# Altium PCB cnc_60X70_PCB.PcbDoc (part 2 of 2)
Units mil, origin at the board's own origin, x right, y up, seen from the top; angles counter-clockwise.
Board outline 3602.36 x 2362.2 mil, 2 copper layers (Top Layer, Bottom Layer); 111 components, 89 nets, 384 pads, 132 vias.
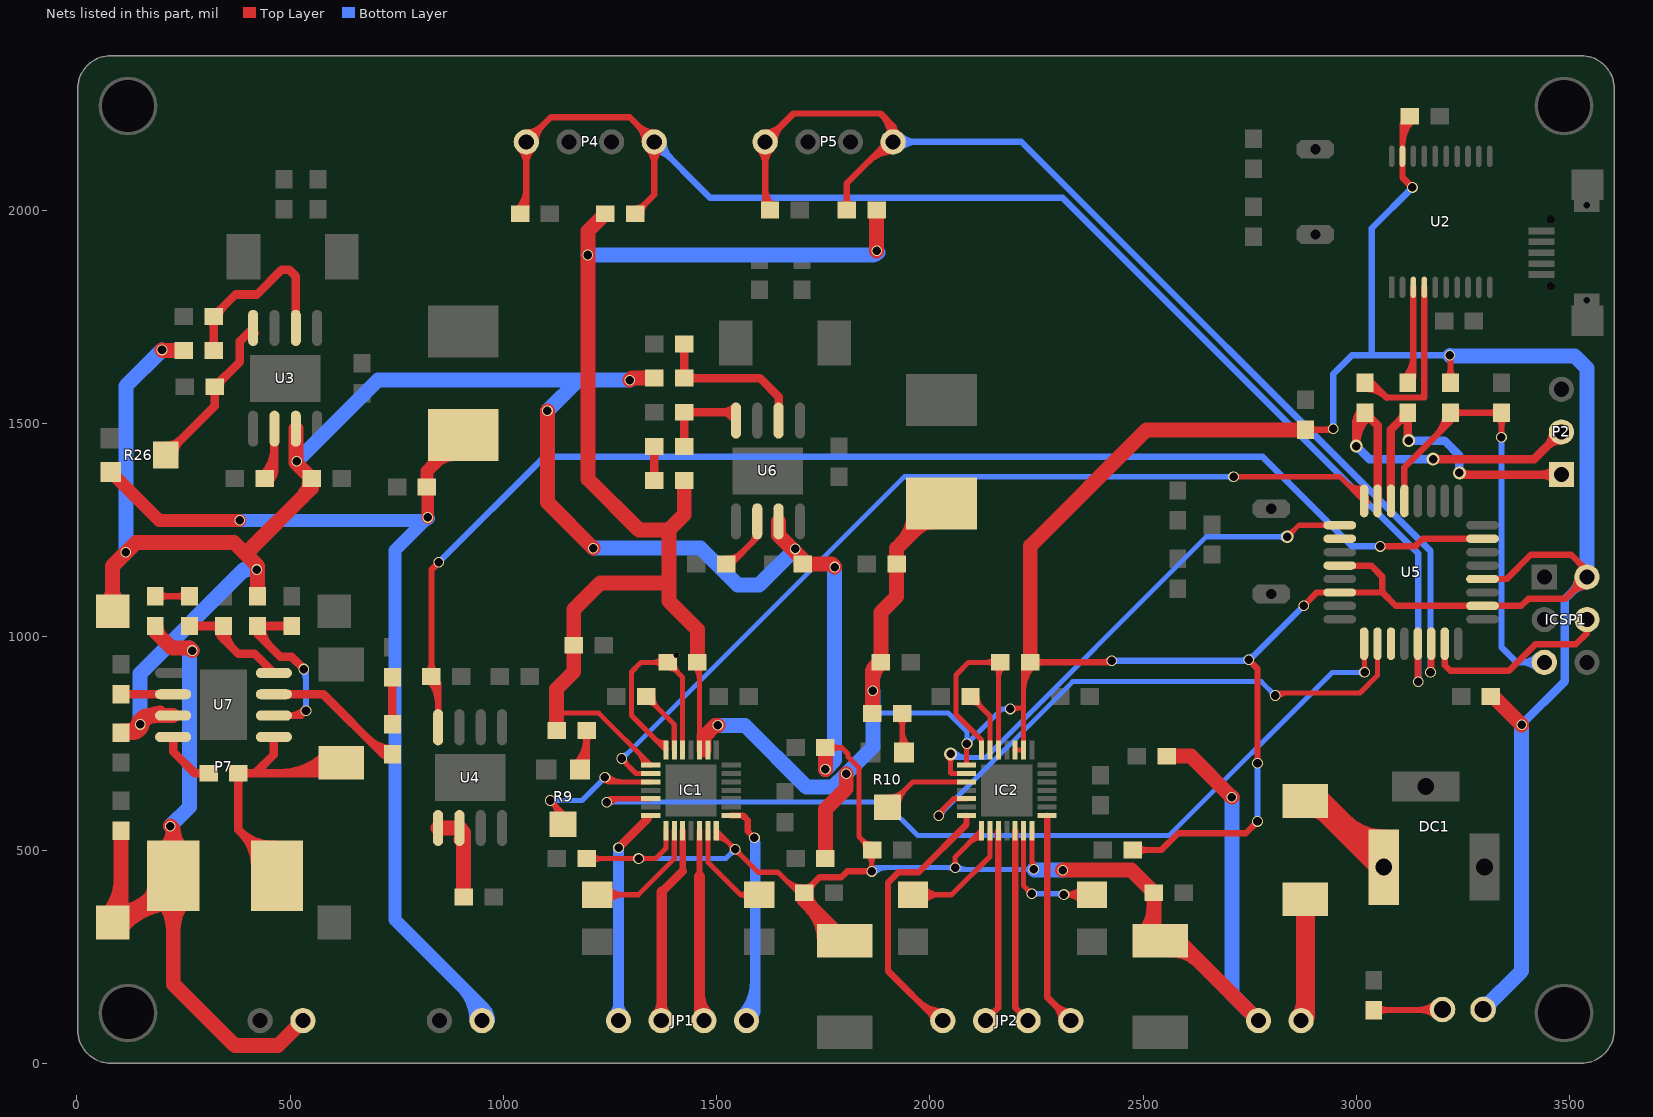
[diagram p2: the nets of this part, all layers, seen from the top]

## Via types
v1: diameter 25, hole 20, Top Layer to Bottom Layer, 93 vias
v2: diameter 28, hole 14, Top Layer to Bottom Layer, 28 vias
v3: diameter 30, hole 20, Top Layer to Bottom Layer, 10 vias
v4: diameter 14, hole 14, Top Layer to Bottom Layer, 1 vias

## Nets (pads, with @x,y where several pads share a name; then routed paths per layer and width w, separated by ;. In a path a pad name is that pad's centre, name@x,y a point inside that pad or via, vN(x,y) a via of type N, cw(c..) or ccw(c..) an arc to the next point about the centre after c; other vN are vias at no path point) (continued)
NetC35_1: C35.1 D5.2 L3.2 U7.1 | length 1249.4
  Top Layer w15: L3.2@469.02,440.16 L3.2@469.02,457.16 ; D5.2@595.15,680.16 D5.2@620,705
  Top Layer w20: C35.1@372.17,673.31 cw(c355.63,656.78) 379.01,656.78 cw(c402.4,656.78) C35.1@385.86,673.31 ; 381.34,544.84 ccw(c459.31,622.81) L3.2@465.95,512.74 ; 385.2,540.98 cw(c306.03,461.81) L3.2@417.99,461.81 ; C35.1@387.83,673.31 cw(c404.36,656.78) 404.36,680.16 cw(c404.36,703.54) C35.1@387.83,687.01 ; L3.2@412.77,513.41 ccw(c462.89,563.52) L3.2@467.15,492.78 ; L3.2@419.34,506.84 cw(c374.31,461.81) L3.2@437.99,461.81 ; U7.1@462.12,765.16 462.12,723.94 418.35,680.16 ; L3.2@469.02,457.16 379.01,547.17 C35.1@379.01,680.16 418.35,680.16 ; 475.33,680.16 ccw(c475.33,835.89) D5.2@585.45,725.77 ; 523.62,680.16 ccw(c523.62,787.6) D5.2@599.59,711.63 ; D5.2@571.9,680.16 ccw(c571.9,739.32) D5.2@613.74,697.48 ; D5.2@595.15,680.16 418.35,680.16
NetC35_2: C35.2 U7.8 | length 175.2
  Top Layer w20: U7.8@225.9,765.16 225.9,730.79 276.54,680.16 C35.2@309.01,680.16 ; C35.2@300.2,673.31 ccw(c283.66,656.78) 283.66,680.16 ccw(c283.66,703.54) C35.2@300.2,687.01
NetC38_1: C38.1 U7.3 | length 459.6
  Top Layer w20: U7.3@462.12,865.16 577.76,865.16 717.91,725 ; 682.4,760.51 ccw(c740,818.11) C38.1@740,736.65 ; 716.54,726.37 ccw(c740,749.83) C38.1@740,716.65 ; C38.1@732.87,718.44 ccw(c717.91,704.66) 717.91,725 ; C38.1@732.87,731.56 cw(c717.91,745.34) 717.91,725 ; C38.1@740,725 717.91,725
NetC38_2: C38.2 R40.2 | length 183.5
  Top Layer w20: C38.2@733.15,803.82 ccw(c716.62,820.35) 740,820.35 ccw(c763.38,820.35) C38.2@746.85,803.82 ; R40.2@733.15,896.18 cw(c716.62,879.65) 740,879.65 cw(c763.38,879.65) R40.2@746.85,896.18 ; C38.2@740,795 R40.2@740,905
NetD1_1: D1.1 DC1.2 | length 405.3
  Top Layer w60: D1.1@2880,615 2908.78,615 DC1.2@3063.78,460 ; D1.1@2893.78,605.63 cw(c2893.78,546.8) 2935.38,588.4 ; 2963.77,560.01 ccw(c3063.78,660.01) DC1.2@3063.78,518.58
NetD1_2: D1.2 P1.1 | length 393.3
  Top Layer w15: P1.1@2870,100 P1.1@2880,110
  Top Layer w45: P1.1@2865.03,104.97 ccw(c2828.89,141.11) 2880,141.11 ; D1.2@2868.07,373.07 cw(c2839.27,344.27) 2880,344.27 cw(c2920.73,344.27) D1.2@2891.93,373.07 ; P1.1@2880,110 D1.2@2880,385
NetD2_2: D2.2 R11.1 | length 291.7
  Top Layer w15: R11.1@3040,125 D2.2@3200.2,125 ; R11.1@3048.62,116.39 cw(c3069.42,95.58) 3069.42,125 cw(c3069.42,154.42) R11.1@3048.62,133.62 ; 3144.15,125 ccw(c3144.15,183.49) D2.2@3185.51,142.13 ; 3150.04,125 cw(c3150.04,74.85) D2.2@3185.51,110.31
NetIC1_1: IC1.1 JP1.1 | length 644.4
  Top Layer w15: IC1.1@1534.48,580.95 1561.77,580.95 1572.83,569.88 1572.83,544.29 v1(1588.58,528.54)
  Bottom Layer w12: JP1.1@1570,100 JP1.1@1572.83,102.83
  Bottom Layer w25: JP1.1@1557.96,112.04 ccw(c1479.28,190.72) 1590.55,190.72 ; JP1.1@1572.83,102.83 1590.55,120.55 v1@1590.55,517.72 ; JP1.1@1575.64,94.36 ccw(c1539.63,130.37) 1590.55,130.37
NetIC1_12: IC1.12 IC1.14 R14.1 | length 680.5
  Top Layer w12: 1352.54,762.89 ccw(c1380.94,791.29) IC1.14@1380.94,751.13 ; 1373.02,742.4 ccw(c1380.94,750.32) IC1.14@1380.94,739.13 ; R14.1@1373.35,930.32 ccw(c1349.99,906.96) 1349.99,940 ccw(c1349.99,973.04) R14.1@1373.35,949.68 ; IC1.14@1380.94,734.49 1300.2,815.23 1300.2,917.32 1322.87,940 R14.1@1385,940 ; R14.1@1380.94,935.94 R14.1@1385,940 ; R14.1@1386.97,926.31 cw(c1386.97,898.03) 1406.97,918.03 ; R14.1@1400.65,940 ccw(c1438.44,940) 1411.72,913.28 ; IC1.12@1420.31,734.49 1420.31,904.69 R14.1@1385,940
  other v4: 1405.51,956.69
NetIC1_13: IC1.13 R12.2 | length 204.6
  Top Layer w12: R12.2@1335,860 1400.63,794.37 IC1.13@1400.63,734.49 ; R12.2@1336.97,846.32 cw(c1336.97,818.03) 1356.97,838.03 ; R12.2@1350.65,860 ccw(c1388.44,860) 1361.72,833.28
NetIC1_17: IC1.17 R9.3 | length 562.4
  Top Layer w12: v1@1110.24,609.64 cw(c1110.24,593.95) 1121.33,605.05 cw(c1132.43,616.14) v1@1116.74,616.14 ; v1(1110.24,616.14) 1140,586.38 R9.3@1140,560 ; v1@1111.71,614.66 cw(c1072,574.95) R9.3@1126.79,562.63 ; 1127.13,599.25 cw(c1097.17,569.29) R9.3@1138.5,560 ; v1@1234.3,666.39 ccw(c1250.48,682.56) 1250.48,659.69 ; v1(1238.19,670.28) 1248.78,659.69 IC1.17@1345.51,659.69 ; v1@1242.79,674.87 ccw(c1279.45,711.53) 1279.45,659.69
  Bottom Layer w12: v1(1110.24,616.14) 1184.06,616.14 v1(1238.19,670.28) ; v1@1114.83,611.55 cw(c1125.93,600.45) 1125.93,616.14 cw(c1125.93,631.83) v1@1114.83,620.74 ; v1@1231.69,670.28 cw(c1216,670.28) 1227.09,659.18 cw(c1238.19,648.08) v1@1238.19,663.78
NetIC1_21: IC1.21 JP1.4 | length 567.6
  Top Layer w20: v1(1270,505.44) 1338.98,574.41
  Bottom Layer w25: JP1.4@1257.96,112.04 ccw(c1228.89,141.11) 1270,141.11 ccw(c1311.11,141.11) JP1.4@1282.04,112.04 ; JP1.4@1270,100 v1(1270,505.44)
NetIC1_23: IC1.23 R2.1 | length 429.5
  Top Layer w12: R2.1@1220,395.12 1316.38,395.12 1400.63,479.37 IC1.23@1400.63,545.51 ; R2.1@1233.48,385.57 cw(c1256.52,362.54) 1256.52,395.12 cw(c1256.52,427.7) R2.1@1233.48,404.66 ; R2.1@1241.97,377.09 cw(c1285.49,333.56) 1285.49,395.12 cw(c1285.49,456.67) R2.1@1241.97,413.15
NetIC1_24: IC1.24 JP1.3 | length 530.9
  Top Layer w15: 1420.31,450.82 IC1.24@1420.31,545.51
  Top Layer w20: 1371.06,401.57 1420.31,450.82
  Top Layer w25: JP1.3@1357.96,112.04 ccw(c1326.33,143.67) 1371.06,143.67 ; JP1.3@1370,100 1371.06,101.06 1371.06,401.57 ; 1371.06,138.54 ccw(c1408.54,138.54) JP1.3@1382.04,112.04
NetIC1_26: IC1.26 JP1.2 | length 523
  Top Layer w12: JP1.2@1460.63,109.37 JP1.2@1470,100
  Top Layer w15: 1459.68,437.99 IC1.26@1459.68,545.51
  Top Layer w25: 1459.68,166.02 ccw(c1536.02,166.02) JP1.2@1482.04,112.04 ; 1459.68,437.99 1459.68,110.32 JP1.2@1470,100
NetIC1_27: IC1.27 R1.1 | length 269.7
  Top Layer w12: IC1.27@1479.37,545.51 1479.37,471.42 1555.67,395.12 ; R1.1@1573.05,384.15 ccw(c1555.67,375.87) 1555.67,395.12 ; R1.1@1573.05,406.09 cw(c1555.67,414.37) 1555.67,395.12 ; R1.1@1600,395.12 1555.67,395.12
NetIC2_1: IC2.1 JP2.1 | length 587.5
  Top Layer w15: IC2.1@2274.48,580.95 2274.48,155.52 JP2.1@2330,100 ; JP2.1@2307.97,100 ccw(c2254.79,100) 2292.4,137.6 ccw(c2330,175.21) JP2.1@2330,122.03
NetIC2_12: IC2.12 IC2.14 R15.1 | length 640.9
  Top Layer w12: 2116.31,762.63 cw(c2104.9,751.22) IC2.14@2121.04,751.22 ; IC2.14@2120.94,734.49 2120.94,758 2061.02,817.91 2061.02,910.43 2090.59,940 R15.1@2165,940 2160.31,935.31 IC2.12@2160.31,734.49 ; R15.1@2153.36,949.68 cw(c2129.99,973.04) 2129.99,940 cw(c2129.99,906.96) 2153.36,930.32 cw(c2136.56,913.53) 2160.31,913.53 ; 2160.31,900.39 cw(c2202.64,900.39) R15.1@2172.71,930.32
NetIC2_13: IC2.13 R13.2 | length 196.3
  Top Layer w12: R13.2@2095,860 2140.63,814.37 IC2.13@2140.63,734.49 ; R13.2@2096.97,846.31 cw(c2096.97,818.03) 2116.97,838.03 ; R13.2@2110.65,860 ccw(c2148.44,860) 2121.72,833.28
NetIC2_17: IC2.17 R10.3 | length 326.8
  Top Layer w12: R10.3@1900,600 1959.68,659.69 IC2.17@2085.51,659.69 ; R10.3@1901.49,624 ccw(c1901.49,678.33) 1939.91,639.91 ; R10.3@1913.49,600 cw(c1946.08,600) R10.3@1923.04,623.04 ; R10.3@1925.49,600 cw(c1987.05,600) 1943.52,643.53
NetIC2_21: IC2.21 JP2.4 | length 764.4
  Top Layer w12: JP2.4@2018.11,100 JP2.4@2030,100
  Top Layer w15: 1972.1,146.01 ccw(c2030,203.91) JP2.4@2030,122.03 ; 1997.71,120.4 ccw(c2030,152.7) JP2.4@2030,107.03 ; 2000.8,117.31 cw(c1983.5,100) JP2.4@2007.97,100 ; JP2.4@2018.11,100 1901.57,216.54 1901.57,423.23 1926.18,447.83 1973.43,447.83 2085.51,559.92 IC2.21@2085.51,580.95
NetIC2_23: IC2.23 R4.1 | length 426.2
  Top Layer w12: R4.1@1960,395.12 2050.63,395.12 2140.63,485.12 IC2.23@2140.63,545.51 ; R4.1@1973.48,385.58 cw(c1996.52,362.54) 1996.52,395.12 cw(c1996.52,427.7) R4.1@1973.48,404.66 ; R4.1@1981.96,377.09 cw(c2025.49,333.57) 2025.49,395.12 cw(c2025.49,456.67) R4.1@1981.96,413.15
NetIC2_24: IC2.24 JP2.3 | length 458.1
  Top Layer w15: JP2.3@2130,100 2160.31,130.31 IC2.24@2160.31,545.51
NetIC2_26: IC2.26 JP2.2 | length 458.1
  Top Layer w15: IC2.26@2199.68,545.51 2199.68,130.32 JP2.2@2230,100
NetIC2_27: IC2.27 R3.1 | length 516.3
  Top Layer w12: IC2.27@2219.37,545.51 2219.37,416.46 v1(2238.19,397.64) ; v1@2231.69,397.64 ccw(c2216,397.64) 2227.09,408.73 ccw(c2238.19,419.83) v1@2238.19,404.14 ; v1@2315.84,395.67 ccw(c2315.84,455.34) R3.1@2358.03,413.15 ; v1@2318.57,391.07 cw(c2329.67,379.98) 2329.67,395.67 cw(c2329.67,411.36) v1@2318.57,400.27 ; 2342.58,395.67 cw(c2342.58,362.24) R3.1@2366.43,385.66 ; R3.1@2357.87,377.26 ccw(c2313.98,334.15) v1(2313.98,395.67) 2379.45,395.67 R3.1@2380,395.12
  Bottom Layer w12: v1(2238.19,397.64) 2315.94,397.64 v1(2313.98,395.67) ; v1@2242.79,393.04 cw(c2253.88,381.95) 2253.88,397.64 cw(c2253.88,413.33) v1@2242.79,402.23 ; 2293.53,397.64 cw(c2293.53,375.22) v1@2309.38,391.07
NetR5_1: R5.1 R9.1 | length 260.3
  Top Layer w15: R9.1@1167.97,700.34 ccw(c1102.71,765.6) R5.1@1195,765.6 ; R9.1@1178.58,689.73 ccw(c1138.92,729.39) 1195,729.39 ; R9.1@1179.37,688.94 1195,704.57 R5.1@1195,780 ; R5.1@1186.38,771.39 cw(c1165.58,750.58) 1195,750.58 cw(c1224.42,750.58) R5.1@1203.62,771.39
NetR6_1: R6.1 R10.1 | length 234
  Top Layer w12: R6.1@1925.32,810.32 cw(c1901.96,786.96) 1935,786.96 cw(c1968.04,786.96) R6.1@1944.68,810.32 ; R10.1@1926.91,741.4 ccw(c1907.37,760.94) 1935,760.94 ; 1935,753.06 ccw(c1963.49,753.06) R10.1@1943.34,732.91 ; 1935,782.03 ccw(c1992.46,782.03) R10.1@1951.83,741.4 ; R6.1@1935,820 1935,733.31 R10.1@1939.37,728.94
NetR16_2: R16.2 R17.2 U3.2 | length 555.5
  Top Layer w20: R17.2@313.98,1677.48 ccw(c297.44,1694.01) 320.83,1694.01 ccw(c344.21,1694.01) R17.2@327.67,1677.48 ; R16.2@313.98,1743.78 cw(c297.44,1727.25) 320.83,1727.25 cw(c344.21,1727.25) R16.2@327.67,1743.78 ; R17.2@320.83,1670.63 R16.2@320.83,1750.63 372.36,1802.17 422.24,1802.17 480.31,1860.24 498.03,1860.24 513.46,1844.8 U3.2@513.46,1723.9 ; R16.2@322.8,1760.31 ccw(c322.8,1778.94) R16.2@335.97,1765.77 ; R16.2@332.48,1750.63 cw(c360.61,1750.63) 340.72,1770.52
NetR18_2: R18.2 U3.6 | length 272.8
  Top Layer w20: R18.2@435.95,1377.48 ccw(c369.51,1443.91) 463.46,1443.91 ; R18.2@440.83,1370.63 463.46,1393.27 U3.6@463.46,1487.68 ; R18.2@442.8,1380.31 ccw(c442.8,1398.94) R18.2@455.97,1385.77 ; R18.2@450.09,1363.34 ccw(c417.8,1395.63) 463.46,1395.63 ; R18.2@452.48,1370.63 cw(c480.61,1370.63) 460.72,1390.52
NetR19_2: R19.2 U2.4 | length 496.8
  Top Layer w15: R19.2@3020,1580.85 cw(c3020,1508.28) 3071.31,1559.59 ; R19.2@3020,1595 3035.9,1595 3070.19,1560.72 3158.77,1560.72 U2.4@3158.77,1819 ; R19.2@3020,1595.85 cw(c3020,1559.49) 3045.71,1585.2
NetR21_2: R21.2 R26.3 U3.4 | length 557.5
  Top Layer w20: R26.3@208.46,1425.79 323.47,1540.79 R21.2@323.47,1585.79 381.89,1644.21 381.89,1692.32 U3.4@413.46,1723.9 ; R26.3@208.46,1447.28 ccw(c208.46,1499.18) 245.16,1462.48 ; R26.3@228.46,1427.28 cw(c273.14,1427.28) 241.55,1458.87 ; R21.2@316.62,1578.94 cw(c300.08,1562.41) 323.47,1562.41 cw(c346.85,1562.41) R21.2@330.31,1578.94 ; R21.2@325.44,1595.47 ccw(c325.44,1614.1) R21.2@338.61,1600.93 ; R21.2@335.12,1585.79 cw(c363.25,1585.79) 343.36,1605.68 ; 393.64,1704.07 cw(c412.06,1685.64) U3.4@416.71,1711.28
NetR22_2: R22.2 U4.5 U4.6 | length 232.1
  Top Layer w35: U4.5@847.01,551.57 U4.6@897.01,551.57 907.01,541.57 R22.2@907.01,389.69 ; U4.6@901.03,525.08 cw(c886.6,510.65) 907.01,510.65
NetR25_1: R25.1 U2.3 | length 317.9
  Top Layer w15: R25.1@3111.38,1605.58 ccw(c3058.76,1658.2) 3133.18,1658.2 ; R25.1@3120,1595 3133.18,1608.18 U2.3@3133.18,1819 ; R25.1@3121.99,1594.98 ccw(c3094.98,1621.99) 3133.18,1621.99
NetR29_2: R29.2 R31.2 U6.2 | length 485.2
  Top Layer w20: R31.2@1417.21,1613.03 ccw(c1400.67,1629.56) 1424.06,1629.56 ccw(c1447.44,1629.56) R31.2@1430.9,1613.03 ; R29.2@1417.21,1679.33 cw(c1400.67,1662.8) 1424.06,1662.8 cw(c1447.44,1662.8) R29.2@1430.9,1679.33 ; R29.2@1424.06,1686.18 R31.2@1424.06,1606.18 1601.5,1606.18 1645.16,1562.52 U6.2@1645.16,1506.65 ; R31.2@1432.87,1599.33 cw(c1449.41,1582.8) 1449.41,1606.18 cw(c1449.41,1629.56) R31.2@1432.87,1613.03
NetR32_2: R32.2 U6.6 | length 197.1
  Top Layer w15: R32.2@1522.01,1170.24 1532.44,1170.24 1595.16,1232.95 U6.6@1595.16,1270.43 ; R32.2@1523.98,1182.42 ccw(c1523.98,1232.27) 1559.23,1197.02 ; 1582.87,1220.67 ccw(c1563.62,1239.92) U6.6@1590.85,1239.92
NetR33_2: R33.2 R35.2 U6.4 | length 374.9
  Top Layer w20: R35.2@1417.21,1453.03 ccw(c1400.67,1469.56) 1424.06,1469.56 ccw(c1447.44,1469.56) R35.2@1430.9,1453.03 ; R33.2@1417.21,1519.33 cw(c1400.67,1502.8) 1424.06,1502.8 cw(c1447.44,1502.8) R33.2@1430.9,1519.33 ; R35.2@1424.06,1446.18 R33.2@1424.06,1526.18 1525.63,1526.18 ; R33.2@1432.87,1519.33 cw(c1449.41,1502.8) 1449.41,1526.18 cw(c1449.41,1549.56) R33.2@1432.87,1533.03 ; 1514.27,1526.18 ccw(c1514.27,1568.05) U6.4@1543.88,1538.45 ; U6.4@1543.5,1537.89 cw(c1525.63,1545.67) 1525.63,1526.18 ; U6.4@1545.16,1506.65 1525.63,1526.18
NetR35_1: R35.1 R37.2 | length 153.5
  Top Layer w20: R37.2@1347.21,1373.03 ccw(c1330.67,1389.56) 1354.06,1389.56 ccw(c1377.44,1389.56) R37.2@1360.9,1373.03 ; R35.1@1347.21,1439.33 cw(c1330.67,1422.8) 1354.06,1422.8 cw(c1377.44,1422.8) R35.1@1360.9,1439.33 ; R37.2@1354.06,1366.18 R35.1@1354.06,1446.18
NetR38_2: R38.2 R39.2 U7.2 | length 608.5
  Top Layer w15: R39.2@424.01,1006.1 R39.2@424.01,1025.16 ; U7.2@462.12,815.16 525.79,815.16 v1(537.4,826.77) ; U7.2@497.29,815.16 ccw(c497.29,866.88) v1@533.87,830.31
  Top Layer w20: R39.2@424.01,1006.1 477.36,952.76 503.94,952.76 v1(532.48,924.21) ; R39.2@424.01,1025.16 R38.2@504.01,1025.16 ; R39.2@430.86,1018.31 cw(c447.4,1001.78) 447.4,1025.16 cw(c447.4,1048.54) R39.2@430.86,1032.01 ; R39.2@433.7,1023.19 ccw(c498.33,1023.19) 452.63,977.49 ; R38.2@497.17,1018.31 ccw(c480.63,1001.78) 480.63,1025.16 ccw(c480.63,1048.54) R38.2@497.17,1032.01
  Bottom Layer w15: v1@528.94,920.68 cw(c508.53,900.26) 537.4,900.26 ; v1(532.48,924.21) 537.4,919.29 v1(537.4,826.77)
NetR41_1: R41.1 R42.2 | length 172.4
  Top Layer w15: R42.2@184.02,1095.16 R41.1@264.01,1095.16 ; R42.2@192.63,1086.54 cw(c213.44,1065.74) 213.44,1095.16 cw(c213.43,1124.57) R42.2@192.63,1103.77 ; R41.1@255.4,1086.54 ccw(c234.6,1065.74) 234.6,1095.16 ccw(c234.6,1124.58) R41.1@255.4,1103.78
NetR41_2: R41.2 R43.2 U7.4 | length 513.4
  Top Layer w20: R41.2@264.01,1025.16 R43.2@344.01,1025.16 344.01,994.57 378.94,959.65 417.64,959.65 U7.4@462.12,915.16 ; R41.2@270.86,1018.31 cw(c287.4,1001.78) 287.4,1025.16 cw(c287.4,1048.54) R41.2@270.86,1032.01 ; R43.2@334.17,1026.28 ccw(c361.64,1017.66) 341.28,997.3 ; R43.2@337.17,1018.31 ccw(c320.63,1001.78) 320.63,1025.16 ccw(c320.63,1048.54) R43.2@337.17,1032.01 ; R43.2@353.26,1020.29 ccw(c397.17,1006.51) 364.62,973.96 ; 441.09,936.19 cw(c420.05,915.16) U7.4@449.8,915.16 ; 344.01,999.81 ccw(c320.63,999.81) 337.17,1016.34 cw(c320.63,999.81) 344.01,999.81 ; 344.01,999.81 cw(c367.4,999.81) 350.86,1016.34 ccw(c367.4,999.81) 344.01,999.81
NetR44_2: R44.2 U7.6 | length 158.6
  Top Layer w20: R44.2@104.01,865.16 U7.6@225.9,865.16 ; R44.2@110.86,858.31 cw(c127.39,841.78) 127.39,865.16 ; R44.2@110.86,872.01 ccw(c127.4,888.55) 127.4,865.16
RESET_MCU: C18.2 ICSP1.5 R36.1 U5.29 | length 1342.9
  Top Layer w15: U5.29@3112.09,1318.35 3112.09,1397.52 3220,1505.43 R36.1@3220,1525 C18.2@3340,1525 3339.57,1524.57 v1(3339.57,1467.52) ; 3186.75,1472.18 ccw(c3135.9,1523.03) R36.1@3207.81,1523.03 ; 3212.36,1497.79 ccw(c3187.12,1523.03) R36.1@3222.81,1523.03 ; R36.1@3228.61,1516.39 cw(c3249.42,1495.58) 3249.42,1525 cw(c3249.42,1554.42) R36.1@3228.61,1533.62 ; C18.2@3331.38,1514.42 cw(c3311.63,1494.66) 3339.57,1494.66 ; C18.2@3331.38,1516.39 ccw(c3310.58,1495.58) 3310.58,1525 ccw(c3310.58,1554.42) C18.2@3331.38,1533.62 ; 3339.57,1492.57 cw(c3370.46,1492.57) C18.2@3348.62,1514.42
  Bottom Layer w15: v1(3339.57,1467.52) 3339.57,975.39 3374.96,940 ICSP1.5@3440,940 ; ICSP1.5@3424.42,924.43 ccw(c3386.82,886.82) 3386.82,940 ccw(c3386.82,993.18) ICSP1.5@3424.42,955.58
RXD: P2.1 R25.2 U5.30 | length 886.1
  Top Layer w20: U5.30@3080.59,1318.35 3080.59,1485.59 R25.2@3120,1525 3120,1461.69 v3(3122.05,1459.65) ; 3100.11,1505.11 cw(c3120,1485.21) R25.2@3120,1513.35 ; R25.2@3104.86,1509.86 ccw(c3091.69,1523.03) R25.2@3110.32,1523.03 ; R25.2@3113.15,1516.18 cw(c3096.62,1499.65) 3120,1499.65 cw(c3143.38,1499.65) R25.2@3126.85,1516.18 ; 3120,1476.66 ccw(c3139.06,1476.66) v3@3125.58,1463.18 ; v3(3241.14,1383.86) 3245,1380 P2.1@3480,1380 ; v3@3244.68,1387.39 ccw(c3262.52,1405.24) 3262.52,1380 ; P2.1@3466.19,1366.19 ccw(c3432.86,1332.86) 3432.86,1380 ccw(c3432.86,1427.14) P2.1@3466.19,1393.81
  Bottom Layer w20: v3(3122.05,1459.65) 3205.71,1459.65 3241.14,1424.21 v3(3241.14,1383.86)
TXD: P2.2 R19.1 U5.31 | length 1084.4
  Top Layer w20: v3(2999.02,1446.85) 2999.02,1504.02 R19.1@3020,1525 3049.09,1495.91 U5.31@3049.09,1318.35 ; v3@2999.02,1448.99 cw(c3094.04,1448.99) R19.1@3026.85,1516.18 ; 2999.02,1497.28 cw(c3045.75,1497.28) R19.1@3012.7,1530.33 ; 3000.1,1505.11 cw(c3020,1485.21) 3020,1513.35 cw(c3020,1485.21) 3039.89,1505.11 ; R19.1@3004.86,1509.86 ccw(c2991.68,1523.03) R19.1@3010.31,1523.03 ; R19.1@3029.68,1523.03 ccw(c3048.31,1523.03) R19.1@3035.14,1509.86 ; v3(3179.13,1416.34) 3416.34,1416.34 P2.2@3480,1480 ; P2.2@3460.47,1480 cw(c3413.33,1480) 3446.67,1446.67 cw(c3480,1413.33) P2.2@3480,1460.47
  Bottom Layer w20: v3(2999.02,1446.85) 3029.53,1416.34 v3(3179.13,1416.34)
V_PRO: C37.1 L3.1 P6.1 P7.2 R42.1 | length 2410.3
  Top Layer w35: P7.2@68.55,345.62 ccw(c-17.06,431.24) 104.01,431.24 ; P7.2@84.02,352.03 ccw(c84.02,482.57) L3.1@176.33,390.26 ; C37.1@104.01,545.16 104.01,350.16 P7.2@84.02,330.16 116.22,330.16 L3.1@226.22,440.16 ; P7.2@114.96,328.89 cw(c226.22,217.63) L3.1@226.22,374.98 ; L3.1@167.23,381.17 ccw(c129.9,418.5) L3.1@182.7,418.5 ; R42.1@184.02,1025.16 184.02,1011.85 220.71,975.16 222.47,975.16 224.21,973.43 264.76,973.43 v1(270.67,967.52) ; R42.1@186.2,1023.19 ccw(c218.85,1023.19) 195.76,1000.1 ; L3.1@195.44,387.73 cw(c121.15,313.43) 226.22,313.43 cw(c331.3,313.43) L3.1@257,387.73 ; L3.1@199.95,496.51 ccw(c159.92,549.37) v1@226.22,549.37 ; v1(219.49,556.1) v1@226.22,549.37 ; L3.1@252.5,496.51 cw(c292.52,549.37) v1@226.22,549.37 ; P6.1@530,100 471.34,41.34 371.06,41.34 226.22,186.18 L3.1@226.22,440.16 ; L3.1@226.22,440.16 v1@226.22,549.37
  Bottom Layer w35: v1(219.49,556.1) 264.76,601.38 264.76,973.43 v1(270.67,967.52)
VCC: C8.1 C10.1 C16.2 C27.2 C30.2 C34.1 D2.1 IC1.9 IC1.10 IC1.15 IC2.9 IC2.10 IC2.15 ICSP1.2 L2.1 R5.2 R6.2 R7.2 R8.2 R14.2 R15.2 R27.2 R28.2 R36.2 R37.1 U2.19 U5.4 U5.6 U5.18 U5.20 | length 13302.6
  Top Layer w12: 1130.91,820.87 1223.7,820.87 IC1.15@1345.51,699.06 ; 1317.11,727.46 cw(c1288.71,699.06) IC1.15@1328.87,699.06 ; 1337.59,706.97 cw(c1329.68,699.06) IC1.15@1340.87,699.06 ; R14.2@1447.29,930.32 cw(c1417.38,900.41) 1459.68,900.41 ; R14.2@1455,940 1459.68,935.32 IC1.10@1459.68,734.49 1470.47,734.49 IC1.9@1479.37,734.49 ; 1459.68,913.51 cw(c1483.45,913.51) R14.2@1466.64,930.32 ; v1@2082.02,744.42 cw(c2073.59,735.99) 2085.51,735.99 ; IC2.15@2085.51,699.06 2085.51,747.91 v1(2086.61,749.02) ; 2085.51,730.66 cw(c2104.97,730.66) v1@2091.21,744.42 ; v1(2187.99,830.71) 2189.96,832.68 2219.37,832.68 ; v1@2192.59,826.11 cw(c2208.44,810.26) 2208.44,832.68 ; IC2.10@2199.68,734.49 IC2.9@2219.37,734.49 2219.37,832.68 ; 2219.37,873.98 cw(c2299.05,873.98) R15.2@2242.71,930.32 ; 2219.37,902.95 cw(c2270.08,902.95) R15.2@2234.22,938.81 ; R15.2@2235,940 2219.37,924.37 2219.37,832.68
  Top Layer w15: R15.2@2235,940 2422.28,940 v1(2426.18,943.9) ; R15.2@2245.59,931.38 cw(c2266.39,910.58) 2266.39,940 cw(c2266.39,969.42) R15.2@2245.59,948.62 ; 2404.7,940 ccw(c2404.7,965.38) v1@2422.65,947.43 ; R8.2@2475,500 2542.32,500 2581.69,539.37 2740.16,539.37 v1(2767.72,566.93) ; R8.2@2485.59,491.39 cw(c2506.39,470.58) 2506.39,500 cw(c2506.39,529.42) R8.2@2485.59,508.62 ; v1(2747.05,945.87) 2767.72,925.2 v1(2767.72,703.74) ; v1(2875.98,1072.83) 2906.93,1103.78 U5.6@2960.51,1103.78 3060.59,1103.78 ; C27.2@2880,1485 2942.68,1485 v1(2944.88,1487.2) ; C27.2@2888.61,1476.39 cw(c2909.42,1455.58) 2909.42,1485 cw(c2909.42,1514.42) C27.2@2888.61,1493.62 ; 2927.49,1485 ccw(c2927.49,1504.6) v1@2941.35,1490.74 ; U5.4@2960.51,1166.77 3034.02,1166.77 3060.59,1140.2 3060.59,1103.78 ; 3107.59,2153.31 cw(c3189.73,2153.31) C16.2@3131.65,2211.39 ; 3107.59,2189.52 cw(c3153.52,2189.52) C16.2@3121.04,2221.99 ; C16.2@3125,2220 3107.59,2202.59 U2.19@3107.59,2126.09 3107.59,2076.46 v1(3130.91,2053.15) ; R36.2@3211.38,1605.59 ccw(c3190.58,1626.39) 3220,1626.39 ccw(c3249.42,1626.39) R36.2@3228.61,1605.59 ; v1@3214.97,1655.91 cw(c3202.82,1643.77) 3220,1643.77 ; v1(3218.5,1659.45) 3220,1657.95 R36.2@3220,1595 ; U5.20@3295.16,1135.28 3351.81,1135.28 3408.46,1191.93 3502.95,1191.93 3540,1154.88 ICSP1.2@3540,1140 3488.58,1088.58 3402.56,1088.58 3386.26,1072.28 U5.18@3295.16,1072.28 3092.09,1072.28 3060.59,1103.78 ; ICSP1.2@3517.97,1140 cw(c3464.79,1140) 3502.4,1102.4 cw(c3540,1064.79) ICSP1.2@3540,1117.97 ; 3519.44,1175.44 cw(c3486.63,1142.62) ICSP1.2@3532.98,1140.35 ; 3527.8,1167.08 ccw(c3540,1179.28) ICSP1.2@3540,1162.03
  Top Layer w35: R5.2@1125,780 1125,877.95 1165,917.95 C8.1@1165,980 1165,1063.62 1227.36,1125.98 1387.8,1125.98 ; v1(1197.93,1894.78) v1@1198.82,1894.78 ; R27.2@1239.13,1991.69 1198.82,1951.38 v1@1198.82,1894.78 ; R37.1@1424.06,1366.18 1424.06,1286.26 1387.8,1250 ; R14.2@1455,940 1455,1016.46 1387.8,1083.66 1387.8,1125.98 ; 1470.47,734.49 1470.55,734.57 1470.55,766.35 1496.52,792.32 v1(1502.95,792.32) ; R7.2@1755,480 1755,595.55 1803.67,644.22 v1(1803.67,678.67) ; R6.2@1865,820 1865,920 C10.1@1885,940 1885,1057.24 1922.01,1094.25 C34.1@1922.01,1170.24 1922.01,1207.44 L2.1@2027.01,1312.44 ; 1865,891.19 cw(c1931.84,891.19) C10.1@1884.58,938.46 ; 1865,913.07 cw(c1890.86,913.07) C10.1@1883.64,937.9 ; v1(1875,1904.53) R28.2@1875,2000 ; 1932.84,1218.27 ccw(c1859.34,1291.77) L2.1@1962.26,1306.34 ; L2.1@1968.02,1253.45 cw(c2005.35,1216.12) L2.1@2005.35,1268.92 ; R15.2@2235,940 2235,1212.36 2507.64,1485 C27.2@2880,1485 ; C30.2@3315,860 3320.12,860 v1(3386.81,793.31) ; v1@1198.82,1894.78 1198.82,1369.09 1317.91,1250 1387.8,1250 ; 1387.8,1125.98 1387.8,1250
  Bottom Layer w12: 1866.14,820.87 2043.31,820.87 2086.61,777.56 v1(2086.61,749.02) 2168.31,830.71 v1(2187.99,830.71) ; v1@2082.02,753.61 ccw(c2070.92,764.71) 2086.61,764.71 ccw(c2102.31,764.71) v1@2091.21,753.61 ; v1@2086.61,755.52 ccw(c2086.61,771.21) 2097.71,760.11 ccw(c2108.81,749.02) v1@2093.11,749.02 ; v1@2183.4,826.11 ccw(c2172.3,815.02) 2172.3,830.71 ccw(c2172.3,846.4) v1@2183.4,835.3
  Bottom Layer w15: v1(2426.18,943.9) 2747.05,943.9 v1(2875.98,1072.83) ; 2730.22,943.9 ccw(c2730.22,962.69) v1@2743.51,949.4 ; v1@2747.05,950.87 ccw(c2747.05,967.69) 2758.94,955.79 ; v1(2767.72,566.93) v1(2767.72,703.74) ; v1(2944.88,1487.2) 2944.88,1615.16 2989.17,1659.45 3035.43,1659.45 ; v1(3130.91,2053.15) 3035.43,1957.68 3035.43,1659.45 ; v1(3218.5,1659.45) 3035.43,1659.45
  Bottom Layer w20: v1(3386.81,793.31) 3386.81,794.29 3488.19,895.67 3488.19,1088.19 ICSP1.2@3540,1140 ; ICSP1.2@3520.47,1140 cw(c3473.33,1140) 3506.67,1106.67 cw(c3540,1073.33) ICSP1.2@3540,1120.47
  Bottom Layer w35: v1(1197.93,1894.78) 1865.25,1894.78 v1(1875,1904.53) ; v1(1502.95,792.32) 1565.94,792.32 1710.63,647.64 1772.64,647.64 v1(1803.67,678.67) 1866.14,741.14 1866.14,820.87 v1(1866.14,873.03) ; 1863.53,1894.78 ccw(c1863.53,1916) v1@1878.54,1900.99 ; v1(3218.5,1659.45) 3219.49,1658.46 3510.83,1658.46 3540,1629.29 ICSP1.2@3540,1140 ; D2.1@3296.42,126.22 3386.81,216.62 v1(3386.81,793.31) ; D2.1@3296.42,138.72 ccw(c3296.42,168.9) 3317.76,147.56 ccw(c3339.09,126.22) D2.1@3308.92,126.22
VCC_LASER: C25.1 L1.1 P3.1 R26.2 | length 2550.9
  Top Layer w30: R26.2@79.53,1386.42 193.31,1272.64 v1(381.89,1272.64) ; v1(822.83,1279.53) 822.83,1348.62 C25.1@820.83,1350.63 820.83,1387.84 L1.1@905.83,1472.84 ; 831.66,1398.66 ccw(c796.26,1434.06) L1.1@842.06,1454.26 ; 842.57,1409.58 cw(c884.17,1367.98) L1.1@884.17,1426.81
  Bottom Layer w30: v1(381.89,1272.64) v1@815.94,1272.64 ; 812.24,1272.64 ccw(c812.24,1290.13) v1@824.6,1277.76 ; v1(822.83,1279.53) v1@815.94,1272.64 ; 902.09,180.58 cw(c821.51,100) P3.1@935.47,100 ; P3.1@950,100 950,132.68 746.06,336.61 746.06,1202.76 v1@815.94,1272.64 ; 953.31,129.37 cw(c923.94,100) P3.1@965.47,100
VIN: C1.1 C2.1 C3.2 C4.1 C5.2 C6.1 C11.1 C12.1 C20.1 C32.1 C36.1 IC1.22 IC1.28 IC2.22 IC2.28 P1.2 P7.1 R17.1 R31.1 R39.1 U3.7 U6.7 U7.7 | length 10149.5
  Top Layer w12: v1(1316.93,480) C3.2@1195,480 1356.97,480 1380.94,503.97 IC1.22@1380.94,545.51 ; v1@1321.53,475.41 cw(c1332.62,464.31) 1332.62,480 cw(c1332.62,495.69) v1@1321.53,484.6 ; IC1.28@1499.05,528.87 cw(c1499.05,488.71) 1527.45,517.11 ; IC1.28@1499.05,540.87 cw(c1499.05,529.68) 1506.97,537.59 ; IC1.28@1499.05,545.51 1596.73,447.83 1643.7,447.83 1691.54,400 C4.1@1705,400 ; 1530.99,513.57 ccw(c1543.31,525.88) v1@1543.31,508.47 ; 1532.72,511.85 cw(c1522.84,501.97) v1@1536.81,501.97 ; v1@1543.31,495.47 cw(c1543.31,481.5) 1553.19,491.38 ; v1@1549.81,501.97 ccw(c1567.22,501.97) 1554.91,489.65 ; 1660.05,431.49 ccw(c1703.03,474.48) C4.1@1703.03,413.68 ; 1680.53,411 ccw(c1703.03,433.51) C4.1@1703.03,401.68 ; C11.1@1755,740 1793.47,740 1808.07,725.39 1808.07,718.69 1833.66,693.1 1833.66,531.34 C5.2@1865,500 1863.19,498.19 v1(1863.19,449.8) ; C11.1@1766.65,730.32 cw(c1790.01,706.96) 1790.01,740 cw(c1790.01,773.04) C11.1@1766.65,749.68 ; 1838.28,526.72 cw(c1811.55,500) C5.2@1849.35,500 ; 1843.03,521.97 ccw(c1863.03,541.97) C5.2@1863.03,513.68 ; C5.2@1853.35,490.32 cw(c1829.61,466.58) 1863.19,466.58 ; v1@1858.59,454.4 ccw(c1847.5,465.5) 1863.19,465.5 ccw(c1878.88,465.5) v1@1867.79,454.4 ; 1863.19,467.34 cw(c1895.68,467.34) C5.2@1872.71,490.32 ; v1@2054.46,463.26 ccw(c2043.36,474.35) 2059.06,474.35 ccw(c2074.75,474.35) v1@2063.65,463.26 ; v1(2059.06,458.66) 2059.06,483.63 IC2.22@2120.94,545.51 ; 2092.54,517.11 cw(c2120.94,488.71) IC2.22@2120.94,528.87 ; 2113.02,537.59 cw(c2120.94,529.68) IC2.22@2120.94,540.87 ; 2239.05,480.5 ccw(c2268.98,480.5) v1@2247.82,459.34 ; IC2.28@2239.05,545.51 2239.05,456.82 2241.12,454.75 v1(2243.22,454.75) ; 1230.01,480 ccw(c1230.01,446.96) 1206.65,470.32 cw(c1230.01,446.96) 1230.01,480 ; 1230.01,480 cw(c1230.01,513.04) 1206.65,489.68 ccw(c1230.01,513.04) 1230.01,480 ; 1301.24,480 ccw(c1301.24,495.69) 1312.33,484.6 cw(c1301.24,495.69) 1301.24,480 ; 1301.24,480 cw(c1301.24,464.31) 1312.33,475.41 ccw(c1301.24,464.31) 1301.24,480
  Top Layer w15: C4.1@1705,400 1741.02,436.02 1792.32,436.02 1806.1,449.8 v1(1863.19,449.8) ; C4.1@1706.97,412.18 ccw(c1706.97,436.85) C4.1@1724.41,419.41 ; C4.1@1719.15,400 cw(c1753.32,400) 1729.16,424.16
  Top Layer w35: P7.1@68.55,1075.62 ccw(c31.22,1112.96) 84.02,1112.96 ccw(c136.82,1112.96) P7.1@99.48,1075.62 ; P7.1@84.02,1060.16 84.02,1165.71 138.78,1220.47 369.09,1220.47 424.01,1165.55 R39.1@424.01,1095.16 ; C36.1@104.02,775.16 129.49,775.16 ; C36.1@104.3,779.29 ccw(c111.27,831.69) v1(148.65,794.31) ; C36.1@114.47,775.16 ccw(c114.47,828.49) v1@152.18,790.78 ; v1@143.83,795.65 cw(c169.49,788.53) 169.49,815.16 ; v1@145.11,797.85 cw(c186.89,756.07) U7.7@186.89,815.16 ; v1@153.42,792.85 cw(c129.49,800.2) 129.49,775.16 ; v1(199.8,1672.24) 201.42,1670.63 R17.1@250.83,1670.63 ; U7.7@225.9,815.16 169.49,815.16 ; 395.67,1193.9 550.83,1349.05 C20.1@550.83,1370.63 513.46,1407.99 U3.7@513.46,1487.68 ; 528.48,1326.71 ccw(c484.56,1370.63) C20.1@546.67,1370.63 ; v1(1103.35,1529.53) 1103.35,1314.96 v1(1210.63,1207.68) ; v1(1296.26,1601.38) 1301.06,1606.18 R31.1@1354.06,1606.18 ; U6.7@1645.16,1270.43 1645.16,1237.72 1702.01,1180.87 C32.1@1702.01,1170.24 1769.73,1170.24 v1(1776.57,1163.39) ; v1@1687.4,1195.47 cw(c1662.16,1170.24) C32.1@1697.86,1170.24 ; C4.1@1705,400 1705,382.5 C1.1@1800,287.5 ; C4.1@1709.15,400 ccw(c1761.43,400) 1724.47,363.03 ; 1718.98,368.52 cw(c1637.96,287.5) C1.1@1752.54,287.5 ; v1(1754.92,688.98) 1754.92,739.92 C11.1@1755,740 ; v1(2311.02,452.76) 2472.24,452.76 C6.1@2525,400 2525,302.5 C2.1@2540,287.5 2582.5,287.5 P1.2@2770,100 ; C2.1@2498.95,302.96 ccw(c2436.05,365.86) 2525,365.86 ; C12.1@2555,720 2611.69,720 v1(2707.68,624.02) ; C2.1@2565.59,265.63 cw(c2565.59,172.01) 2631.79,238.21 ; 129.49,775.16 v1(148.65,794.31) ; v1(148.65,794.31) 169.49,815.16 ; 160.88,806.55 cw(c195.39,772.04) 195.39,820.85 ccw(c195.39,772.04) 160.88,806.55
  Bottom Layer w12: v1(1316.93,480) 1521.34,480 v1(1543.31,501.97) ; v1@1321.53,475.41 cw(c1332.62,464.31) 1332.62,480 cw(c1332.62,495.69) v1@1321.53,484.6 ; v1@1536.81,501.97 cw(c1521.11,501.97) 1532.21,490.87 cw(c1543.31,479.78) v1@1543.31,495.47 ; v1(1863.19,449.8) 1872.05,458.66 v1(2059.06,458.66) 2062.97,454.75 v1(2243.22,454.75) ; v1@1867.79,445.21 cw(c1900.27,412.72) 1900.27,458.66 ; v1@2054.46,454.07 ccw(c2043.36,442.97) 2043.36,458.66 ccw(c2043.36,474.35) v1@2054.46,463.26 ; v1@2063.65,463.26 ccw(c2084.2,483.81) 2084.2,454.75 ; v1@2238.62,450.15 ccw(c2227.53,439.05) 2227.53,454.75 ccw(c2227.53,470.44) v1@2238.62,459.34
  Bottom Layer w35: v1(115.16,1197.83) 115.16,1587.6 v1(199.8,1672.24) ; v1(148.65,794.31) 148.65,913.88 392.25,1157.48 v1@423.23,1157.48 ; v1(515.75,1411.42) 705.71,1601.38 v1(1296.26,1601.38) 1175.2,1601.38 v1(1103.35,1529.53) ; v1(1210.63,1207.68) 1462.6,1207.68 1549.21,1121.06 1599.41,1121.06 v1@1680.61,1202.26 ; v1(1754.92,688.98) 1776.57,710.63 v1(1776.57,1163.39) ; v1(2243.22,454.75) 2245.21,452.76 v1(2311.02,452.76) ; v1(2707.68,624.02) 2707.68,162.32 P1.2@2770,100 ; 379.58,1144.81 cw(c422.24,1102.14) 422.24,1162.48 ccw(c422.24,1102.14) 379.58,1144.81
  other v1: 422.24,1157.48 1684.06,1205.71
WEAKEN-LASER: R24.1 U4.4 U5.23 | length 3180.9
  Top Layer w15: R24.1@822.84,915.27 ccw(c802.04,936.07) 831.46,936.07 ccw(c860.87,936.07) R24.1@840.07,915.27 ; R24.1@824.81,898.04 cw(c771.22,844.45) 847.01,844.45 ; R24.1@835.42,908.64 cw(c807.43,880.66) 847.01,880.66 ; U4.4@847.01,787.79 847.01,891.1 R24.1@831.46,906.65 831.46,1157.24 v1(848.43,1174.21) ; v1(3055.12,1211.61) 3136.81,1211.61 3154.96,1229.76 U5.23@3295.16,1229.76
  Bottom Layer w15: v1(848.43,1174.21) 1096.46,1422.24 2779.53,1422.24 2990.16,1211.61 v1(3055.12,1211.61)
X-DIR: IC1.19 U5.9 | length 2258.2
  Top Layer w12: v1(1242.13,612.2) 1250.24,620.32 IC1.19@1345.51,620.32 ; v1@1246.72,607.61 cw(c1277.4,576.93) 1277.4,620.32 ; v1@3014.1,920.93 ccw(c3003.01,932.03) 3018.7,932.03 ccw(c3034.39,932.03) v1@3023.3,920.93 ; U5.9@3014.88,952.44 cw(c3005.66,943.22) 3018.7,943.22 ; v1(3018.7,916.34) U5.9@3018.7,982.6
  Bottom Layer w12: v1(1242.13,612.2) 1892.72,612.2 1970.47,534.45 2561.02,534.45 2942.91,916.34 v1(3018.7,916.34) ; v1@1246.72,607.61 cw(c1257.82,596.51) 1257.82,612.2 cw(c1257.82,627.9) v1@1246.72,616.8 ; v1@3014.1,911.74 ccw(c3003.01,900.65) 3003.01,916.34 ccw(c3003.01,932.03) v1@3014.1,920.93
X-LMT: C24.1 P4.1 P4.4 R27.1 U5.13 | length 3830.2
  Top Layer w15: C24.1@1032.49,2000.31 ccw(c981.27,2051.52) 1053.7,2051.52 ; P4.4@1038.12,2144.42 cw(c1000.52,2106.82) 1053.7,2106.82 cw(c1106.88,2106.82) P4.4@1069.28,2144.42 ; C24.1@1043.09,1989.7 ccw(c1017.49,2015.31) 1053.7,2015.31 ; C24.1@1053.7,2006.26 P4.4@1053.7,2160 1111.22,2217.52 1296.18,2217.52 P4.1@1353.7,2160 1353.7,2036.26 R27.1@1309.13,1991.69 ; P4.4@1053.7,2182.03 ccw(c1053.7,2235.21) 1091.3,2197.6 ccw(c1128.91,2160) P4.4@1075.73,2160 ; R27.1@1311.1,2003.88 ccw(c1311.1,2028.54) R27.1@1328.54,2011.1 ; R27.1@1323.29,1991.69 cw(c1357.46,1991.69) 1333.29,2015.85 ; P4.1@1331.67,2160 ccw(c1278.49,2160) 1316.1,2197.6 ccw(c1353.7,2235.21) P4.1@1353.7,2182.03 ; P4.1@1338.12,2144.42 cw(c1300.52,2106.82) 1353.7,2106.82 cw(c1406.88,2106.82) P4.1@1369.28,2144.42 ; 3143.58,909.42 ccw(c3159.42,909.42) v1@3148.22,898.22 ; U5.13@3143.58,983.7 3143.58,895.79 v1(3144.68,894.68)
  Bottom Layer w15: P4.1@1353.7,2137.97 cw(c1353.7,2084.79) 1391.3,2122.4 cw(c1428.91,2160) P4.1@1375.73,2160 ; P4.1@1353.7,2160 1485.16,2028.54 2311.02,2028.54 3144.68,1194.88 v1(3144.68,894.68)
X-STEP: IC1.16 U5.32 | length 2315.5
  Top Layer w12: v1(1277.56,714.57) 1277.56,712.6 1310.79,679.37 IC1.16@1345.51,679.37 ; v1@1284.06,714.57 ccw(c1304.5,714.57) 1290.05,700.11 ; v1(2711.61,1375) 2960.94,1375 U5.32@3017.6,1318.35 ; v1@2716.21,1370.4 cw(c2727.31,1359.31) 2727.31,1375 cw(c2727.31,1390.69) v1@2716.21,1379.6 ; 2975.22,1360.73 ccw(c3004.25,1389.76) U5.32@3016.46,1350.56 ; 2989.26,1346.69 ccw(c3010.92,1368.35) U5.32@3020.02,1339.1 ; 3003.3,1332.65 ccw(c3017.58,1346.93) U5.32@3023.59,1327.64 ; U5.32@3017.34,1318.61 ccw(c3024.25,1325.52) U5.32@3027.16,1316.18
  Bottom Layer w12: v1(1277.56,714.57) 1277.56,712.6 1939.96,1375 v1(2711.61,1375) ; v1@1277.56,721.07 ccw(c1277.56,741.51) 1292.02,727.05 ; v1@2707.02,1370.4 ccw(c2695.92,1359.31) 2695.92,1375 ccw(c2695.92,1390.69) v1@2707.02,1379.6
Y-DIR: IC2.19 U5.10 | length 1457.8
  Top Layer w12: v1(2020.67,580.71) 2020.67,585.63 2055.35,620.32 IC2.19@2085.51,620.32 ; v1@2027.17,580.71 cw(c2054.74,580.71) 2035.25,600.21 ; v1(2809.06,862.2) 2814.96,868.11 3007.87,868.11 3049.21,909.45 U5.10@3049.21,991.14 ; v1@2813.65,857.61 cw(c2839,832.26) 2839,868.11 ; U5.10@3048.23,982.84 U5.10@3049.09,983.7
  Bottom Layer w12: v1(2020.67,580.71) 2334.65,894.68 2776.57,894.68 v1(2809.06,862.2) ; v1@2020.67,587.21 ccw(c2020.67,602.9) 2031.77,591.8 ccw(c2042.86,580.71) v1@2027.17,580.71 ; v1@2802.56,862.2 ccw(c2786.86,862.2) 2797.96,873.3 ccw(c2809.06,884.4) v1@2809.06,868.7
Y-LMT: C26.1 P5.1 P5.4 R28.1 U5.14 | length 3399.1
  Top Layer w15: P5.4@1598.12,2144.42 cw(c1560.52,2106.82) 1613.7,2106.82 cw(c1666.88,2106.82) P5.4@1629.28,2144.42 ; 1613.7,2051.94 ccw(c1674.98,2051.94) C26.1@1631.65,2008.62 ; P5.4@1613.7,2182.03 ccw(c1613.7,2235.21) 1651.3,2197.6 ccw(c1688.91,2160) P5.4@1635.73,2160 ; C26.1@1625,2000 1613.7,2011.3 P5.4@1613.7,2160 1680.08,2226.38 1883.86,2226.38 1913.7,2196.54 ; R28.1@1796.38,2008.62 ccw(c1775.58,2029.42) 1805,2029.42 ccw(c1834.42,2029.42) R28.1@1813.62,2008.62 ; R28.1@1805,2000 1805,2062.87 1902.13,2160 P5.1@1913.7,2160 1913.7,2196.54 ; 1856.34,2114.21 cw(c1913.7,2056.85) P5.1@1913.7,2137.97 ; 1881.94,2139.82 cw(c1913.7,2108.06) P5.1@1913.7,2152.97 ; 1884.28,2142.16 ccw(c1866.44,2160) P5.1@1891.67,2160 ; 1886.4,2223.84 cw(c1835.06,2172.5) P5.1@1906.76,2161.1 ; P5.1@1903.42,2179.48 ccw(c1894.42,2196.53) 1913.7,2196.53 ; 1907.2,2203.04 cw(c1870.95,2166.8) P5.1@1921.57,2158.75 ; P5.1@1923.98,2179.48 cw(c1932.99,2196.53) 1913.7,2196.53 ; v1@3169.69,919.87 ccw(c3156.69,932.88) 3175.08,932.88 ; v1(3173.23,916.34) 3175.08,918.19 U5.14@3175.08,983.7
  Bottom Layer w15: P5.1@1913.7,2160 2214.02,2160 3173.23,1200.79 v1(3173.23,916.34) ; P5.1@1929.28,2144.42 cw(c1966.88,2106.82) 1966.88,2160 cw(c1966.88,2213.18) P5.1@1929.28,2175.58
Y-STEP: IC2.16 U5.1 | length 1385.2
  Top Layer w12: v3@2041.86,719.03 cw(c2026.5,703.67) 2048.23,703.67 cw(c2069.96,703.67) v3@2054.59,719.03 ; v3(2048.23,725.39) 2048.23,681.1 2049.96,679.37 IC2.16@2085.51,679.37 ; v3(2837.6,1234.25) 2864.61,1261.26 U5.1@2960.51,1261.26 ; v3@2837.6,1243.25 ccw(c2837.6,1264.98) 2852.96,1249.62 ccw(c2868.33,1234.25) v3@2846.6,1234.25
  Bottom Layer w12: v3@2046.11,723.27 ccw(c2062.37,739.54) 2062.37,716.54 ; v3(2048.23,725.39) 2057.09,716.54 2129.92,716.54 2647.64,1234.25 v3(2837.6,1234.25) ; v3@2054.59,731.76 ccw(c2091.34,768.51) 2091.34,716.54 ; v3@2831.23,1227.89 ccw(c2815.87,1212.52) 2815.87,1234.25 ccw(c2815.87,1255.98) v3@2831.23,1240.62
Z-DIR: U5.11
Z-LMT: ICSP1.4 U5.15 | length 457.3
  Top Layer w15: U5.15@3206.57,983.7 3206.57,933.19 3219.49,920.28 3357.28,920.28 3419.29,982.28 3513.78,982.28 3540,1008.5 ICSP1.4@3540,1040
Z-STEP: U5.2
pads on no net: IC1.11 IC2.11 R26.1 U1. U1.1 U1.4 U2.1 U2.2 U2.11 U2.12 U2.13 U2.14 U2.16 U2.17 U2.18 U2.20 U3.0 U4.0 U5.24 U5.25 U5.26 U5.27 U5.28 U6.0 U7.0

## Polygon pours and split planes (outlines as drawn)
GND on Bottom Layer "Bottom Layer-No Net" (solid, remove dead copper, pour order 1000): -27.56,2406.5 -30.51,2403.54 -30.51,-36.42 3649.61,-36.42 3660.43,-25.59 3639.76,-4.92 3639.76,2431.1
GND on Top Layer "Bottom Layer-No Net" (solid, remove dead copper, pour order 1001): -47.24,2422.24 -47.24,-100.39 -37.4,-110.24 26.57,-46.26 3744.09,-46.26 3744.09,2406.5 3710.63,2439.96

## Keep-outs
Keep-Out Layer:
  circle w10: c3486.22,118.11 r59.06
  circle w10: c3486.22,2244.09 r59.06
  circle w10: c120.08,2244.09 r59.06
  lines w10: 1.97,78.74 ccw(c80.71,78.74) 80.71,0 3525.59,0 ccw(c3525.59,78.74) 3604.33,78.74 3604.33,2283.47 ccw(c3525.59,2283.46) 3525.59,2362.2 80.71,2362.21 ccw(c80.71,2283.46) 1.97,2283.46 1.97,78.74

## Silkscreen, mask and mechanical layers (free items; w line width, h text height)
Top Overlay:
  drawing of 1126 lines, arcs and shapes, not listed
  text "X-LIMT" at 1043.31,2299.21 h51.18
  text "Y-LIMT" at 1611.22,2297.24 h51.18
  text "G T R" at 3535.43,1666.34 h55 r270
  text "Y-STEP" at 2024.61,251.97 h51.18
  text "LASER" at 785.43,246.06 h51.18
  text "X-STEP" at 1261.81,245.08 h51.18
  text "SW" at 2905.51,243.11 h51.18

## Dimensions
3525.59,2362.21 to 3525.59,0 on Keep-Out Layer
1.97,78.74 to 3604.33,78.74 on Keep-Out Layer

## Text inside footprints (layer, text, board x,y; h text height)
ICSP1: Top Overlay "6" at 3520,880 h39.37 r270; Top Overlay "5" at 3420,880 h39.37 r270; Top Overlay "2" at 3520,1240 h39.37 r270; Top Overlay "1" at 3420,1220 h39.37 r270
U1: Top Overlay "+" at 3427.48,1770.08 h39.37 r90